# Altium PCB PCB_jaustry2.PcbDoc (part 2 of 2)
Units mm, origin at the board's own origin, x right, y up, seen from the top; angles counter-clockwise.
Board outline 112 x 80 mm, 8 copper layers (Top Side (Sig 1), Ground Plane 1 (GND), Signal Layer 2, Power Plane 1 (VCC), Power Plane 2 (VCC), Signal Layer 3, Ground Plane 2 (GND), Bottom Side (Sig 4)), stack 1.607 mm thick; 226 components, 308 nets, 1010 pads, 263 vias.
Unrouted connection lines stored in the file: 556.
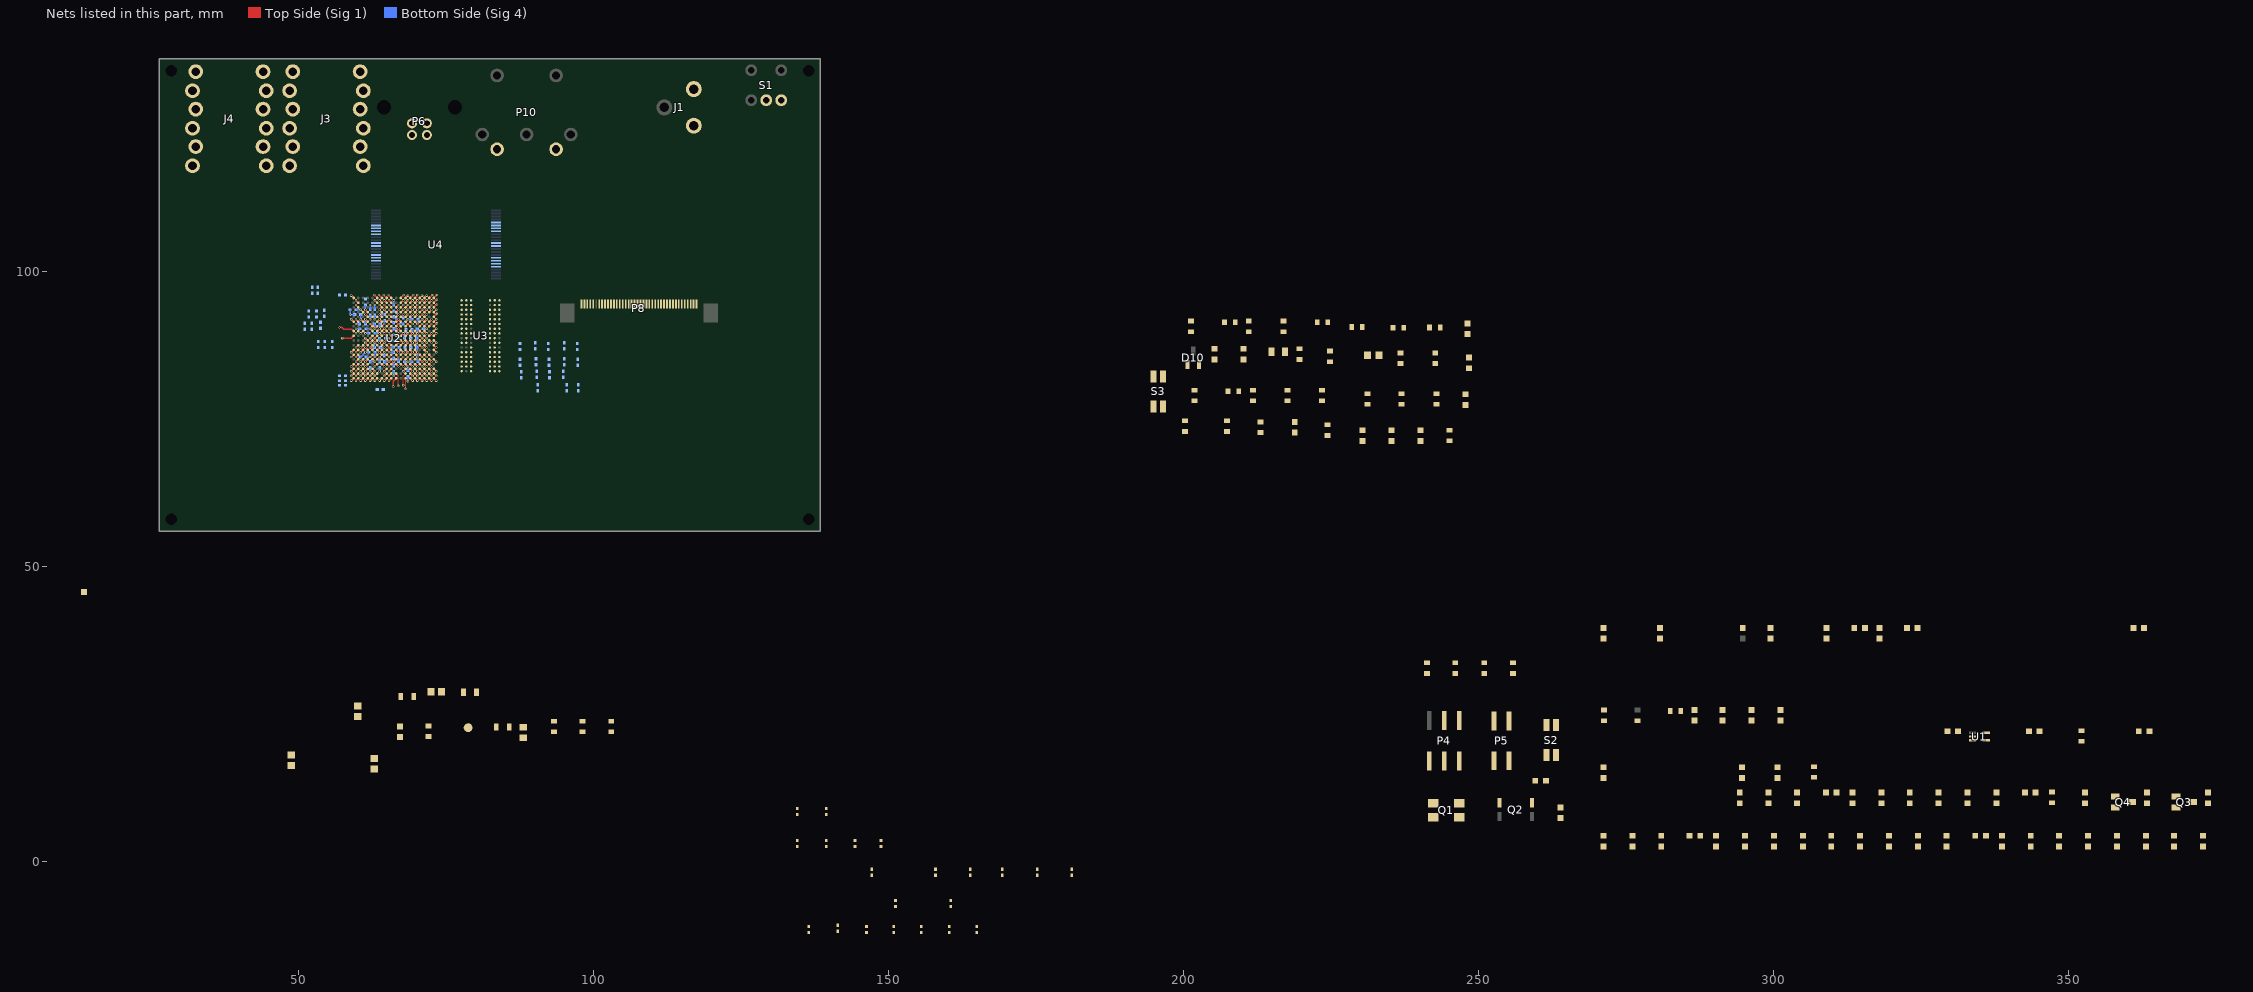
[diagram p6: the nets of this part, all layers, seen from the top]

## Via types
v1: diameter 0.4, hole 0.2, Top Side (Sig 1) to Bottom Side (Sig 4), 262 vias
v2: diameter 0.2, hole 0.1, Top Side (Sig 1) to Bottom Side (Sig 4), 1 vias

## Nets (pads, with @x,y where several pads share a name; then routed paths per layer and width w, separated by ;. In a path a pad name is that pad's centre, name@x,y a point inside that pad or via, vN(x,y) a via of type N, cw(c..) or ccw(c..) an arc to the next point about the centre after c; other vN are vias at no path point) (continued)
#WE: U2.B2 U3.L3 | length 0.6
  Top Side (Sig 1) w0.25: U2.B2@72.2,82.7 v1(72.6,82.3)
+1.1V_CORE: C51.2 C52.1 C53.1 C54.1 C55.1 C56.1 C57.1 C58.1 C59.1 C60.1 C61.1 C62.1 C63.1 C64.1 C167.1 L7.2 U2.F6 U2.F7 U2.G6 U2.G7 U2.G10 U2.H11 U2.J12 U2.K6 U2.K8 U2.K12 U2.L6 U2.L7 U2.L8 U2.L9 U2.M11 U2.M13 U2.N8 U2.N9 U2.N12 U2.N13 | length 19
  Top Side (Sig 1) w0.25: v1(63,90.3) U2.M13@63.4,90.7 ; U2.N13@63.4,91.5 v1(63.8,91.9) U2.N12@64.2,91.5 ; v1(63.8,87.9) U2.J12@64.2,88.3 ; v1(63.8,89.5) U2.K12@64.2,89.1 ; U2.H11@65,87.5 v1(65.4,87.1) U2.G10@65.8,86.7 ; U2.M11@65,90.7 v1(65.4,91.1) ; U2.L9@66.6,89.9 v1(67,90.3) U2.L8@67.4,89.9 ; U2.N9@66.6,91.5 v1(67,91.9) U2.N8@67.4,91.5 ; U2.K8@67.4,89.1 v1(67.8,89.5) U2.L7@68.2,89.9 ; U2.F7@68.2,85.9 v1(68.6,86.3) U2.G7@68.2,86.7 ; U2.F6@69,85.9 v1(69.4,86.3) U2.G6@69,86.7 ; U2.K6@69,89.1 v1(69.4,89.5) U2.L6@69,89.9
  Bottom Side (Sig 4) w0.25: C61.1@62.792,91.1 63,90.892 v1(63,90.3) ; C58.1@63.008,89.5 v1(63.8,89.5) ; C57.1@63.792,88.7 63.792,87.908 v1(63.8,87.9) ; v1(63.8,91.9) v1@63.808,91.892 ; v1(65.4,87.1) 66.108,87.1 C52.1@66.2,87.192 ; C60.1@66.2,90.308 66.208,90.3 v1(67,90.3) ; C59.1@66.2,92.308 66.608,91.9 v1(67,91.9) ; v1(67.8,89.5) 68.016,89.284 C56.1@68.016,88.7 ; C55.1@68.108,87.1 68.108,86.792 v1(68.6,86.3) ; C53.1@69.308,90.2 69.308,89.592 v1(69.4,89.5)
+1.1V_MPU: C73.1 C74.1 C75.1 C76.1 C77.1 C165.1 L6.2 U2.A2 U2.F10 U2.F11 U2.F12 U2.F13 U2.G13 U2.H13 U2.J13 | length 6.2
  Top Side (Sig 1) w0.25: v1(63,85.5) U2.F13@63.4,85.9 ; U2.G13@63.4,86.7 v1(63.8,86.3) U2.F12@64.2,85.9 ; U2.H13@63.4,87.5 v1(63,87.9) U2.J13@63.4,88.3 ; U2.F11@65,85.9 v1(65.4,85.5) U2.F10@65.8,85.9 ; U2.A2@72.2,81.9 v1(72.6,81.5)
  Bottom Side (Sig 4) w0.25: C77.1@62.892,87.1 62.892,87.792 v1(63,87.9) ; v1(63,85.5) 63.008,85.508 C75.1@63.008,86.3
+1.5V_DDR: C14.2 C20.1 C21.1 C23.1 C24.1 C25.1 C26.1 C27.1 C28.1 C29.1 C30.1 C31.1 C32.1 C33.1 C34.1 C35.1 C36.1 C37.1 C38.1 C109.1 C110.1 C111.1 C112.1 C113.1 C114.2 C163.1 L5.2 R4.2 R12.2 U2.E5 U2.F5 U2.G5 U2.H5 U2.J5 U2.K5 U2.L5 U3.A1 U3.A8 U3.B2 U3.C1 U3.C9 U3.D2 U3.D9 U3.E9 U3.F1 U3.G7 U3.H2 U3.H9 U3.K2 U3.K8 U3.N1 U3.N9 U3.R1 U3.R9 | length 9.5
  Top Side (Sig 1) w0.25: U2.E5@69.8,85.1 v1(70.2,85.5) ; U2.F5@69.8,85.9 v1(70.2,86.3) U2.G5@69.8,86.7 ; U2.H5@69.8,87.5 70.1,87.8 v1(70.1,87.9) 70.1,88 U2.J5@69.8,88.3 ; U2.K5@69.8,89.1 v1(70.2,89.5) U2.L5@69.8,89.9
  Bottom Side (Sig 4) w0.25: v1@70.1,89.4 v1(70.1,87.9) 70.108,87.892 C111.1@70.108,87.1 70.2,87.008 v1(70.2,86.3) ; C110.1@70.192,90.3 70.192,89.508 v1(70.2,89.5) ; v1(70.2,86.3) v1(70.2,85.5) 70.2,84.808 C29.1@70.308,84.7
+1.8V_PMIC: C88.1 C89.1 C90.1 C91.1 C92.1 C93.1 C94.1 C95.2 C96.2 C98.2 C108.2 C169.2 L1.2 L2.1 U2.E6 U2.E14 U2.F9 U2.K13 U2.N6 U2.N16 U2.P9 U2.P14 U2.R11 U2.R16 | length 10
  Top Side (Sig 1) w0.25: v1(60.6,91.9) U2.N16@61,91.5 ; v1(60.6,93.5) U2.R16@61,93.1 ; U2.E14@62.6,85.1 v1(63,84.7) ; v1(63,88.7) U2.K13@63.4,89.1 ; v1(64.6,93.5) U2.R11@65,93.1 ; U2.F9@66.6,85.9 v1(67,85.5) ; U2.P9@66.6,92.3 v1(67,92.7) ; U2.E6@69,85.1 v1(69.4,85.5) ; U2.N6@69,91.5 v1(69.4,91.1)
  Bottom Side (Sig 4) w0.25: C90.1@59.808,93.5 v1(60.6,93.5) ; v1(60.6,91.9) 60.608,91.908 C89.1@60.608,92.7 ; C88.1@62.2,84.708 62.992,84.708 v1(63,84.7) ; v1(62.2,91.9) C92.1@62.2,92.592 ; C108.2@66.2,93.292 66.408,93.292 v1(67,92.7) ; C94.1@66.992,84.7 66.992,85.492 v1(67,85.5)
+1.8V_VLDO1: C106.2 C174.1 R85.2 R86.2 U1.5 U2.D7 | length 1.3
  Top Side (Sig 1) w0.25: U2.D7@68.2,84.3 v1(68.6,83.9)
  Bottom Side (Sig 4) w0.25: C106.2@68.6,83.208 v1(68.6,83.9)
+3.3V_CORE: C40.2 C41.2 C49.1 C50.1 C65.1 C66.1 C67.1 C68.1 C69.1 C70.1 C71.1 C72.1 C78.1 C79.1 C80.1 C81.1 C82.1 C83.2 C87.2 C97.2 C116.2 P8.4 P8.31 Q3.2 R3.2 R7.1 R8.2 R9.1 R10.1 R19.2 R20.2 R21.2 R22.2 R23.2 R24.2 R25.2 R26.2 R27.2 R28.2 R29.2 R30.2 R31.2 R32.2 R33.2 R34.2 R35.2 R52.1 R82.1 R83.2 R84.2 U2.E10 U2.E11 U2.E12 U2.E13 U2.F14 U2.G14 U2.H14 U2.J14 U2.K14 U2.L14 U2.N5 U2.N15 U2.P5 U2.P6 U2.P7 U2.P8 U2.P10 U2.P11 U2.P12 U2.P13 U2.R15 U4.12 U4.37 | length 19.8
  Top Side (Sig 1) w0.25: v1(61.4,91.9) U2.N15@61.8,91.5 ; v1(61.4,93.5) U2.R15@61.8,93.1 ; v1(62.2,85.5) U2.F14@62.6,85.9 ; v1(62.2,87.9) U2.J14@62.6,88.3 ; v1(62.2,88.7) U2.K14@62.6,89.1 ; v1(62.2,90.3) U2.L14@62.6,89.9 ; U2.G14@62.6,86.7 v1(62.2,87.1) U2.H14@62.6,87.5 ; U2.E13@63.4,85.075 U2.E13@63.4,85.1 v1(63.8,85.5) 64.175,85.125 64.175,85.075 U2.E12@64.2,85.1 ; v1(63.8,92.7) U2.P12@64.2,92.3 ; U2.E11@65,85.1 v1(65.4,84.7) U2.E10@65.8,85.1 ; U2.P11@65,92.3 v1(65.4,92.7) U2.P10@65.8,92.3 ; U2.P8@67.4,92.3 v1(67.8,92.7) ; U2.P7@68.2,92.3 v1(68.6,92.7) ; U2.P6@69,92.3 v1(69.4,92.7) ; U2.N5@69.8,91.5 v1(70.2,91.1) ; U2.P5@69.8,92.3 v1(70.2,92.7)
  Bottom Side (Sig 4) w0.25: v1(61.4,91.9) 61.408,91.892 C78.1@61.408,91.1 ; v1(61.4,93.5) C80.1@61.4,94.292 ; C87.2@61.508,85.5 v1(62.2,85.5) ; C65.1@61.508,90.3 v1(62.2,90.3) ; v1(63,91.9) C79.1@63,92.592 ; C81.1@63.8,84.708 v1(63.8,85.5) ; v1(63.8,92.7) 63.808,92.708 C68.1@64.6,92.708 ; C50.1@64.6,84.692 65.392,84.692 v1(65.4,84.7) 65.984,85.284 C49.1@66.2,85.284 ; C82.1@67.8,92.208 v1(67.8,92.7) ; v1(70.2,91.1) 70.308,91.208 C66.1@70.308,91.9
+3.3V_VLDO2: C175.1 R89.1
+3.3VA: 
+5V: R81.1
+5VA: 
-5V: 
A0: U2.F3 U3.N3 | length 0.6
  Top Side (Sig 1) w0.25: U2.F3@71.4,85.9 v1(71.8,85.5)
A1: U2.H1 U3.P7 | length 0.6
  Top Side (Sig 1) w0.25: U2.H1@73,87.5 v1(73.4,87.1)
A2: U2.E4 U3.P3 | length 0.6
  Top Side (Sig 1) w0.25: U2.E4@70.6,85.1 v1(71,84.7)
A3: U2.C3 U3.N2 | length 0.6
  Top Side (Sig 1) w0.25: U2.C3@71.4,83.5 v1(71.8,83.1)
A4: U2.C2 U3.P8 | length 0.6
  Top Side (Sig 1) w0.25: U2.C2@72.2,83.5 v1(72.6,83.1)
A5: U2.B1 U3.P2 | length 0.6
  Top Side (Sig 1) w0.25: U2.B1@73,82.7 v1(73.4,82.3)
A6: U2.D5 U3.R8 | length 0.6
  Top Side (Sig 1) w0.25: U2.D5@69.8,84.3 v1(70.2,83.9)
A7: U2.E2 U3.R2 | length 0.6
  Top Side (Sig 1) w0.25: U2.E2@72.2,85.1 v1(72.6,84.7)
A8: U2.D4 U3.T8 | length 0.6
  Top Side (Sig 1) w0.25: U2.D4@70.6,84.3 v1(71,83.9)
A9: U2.C1 U3.R3 | length 0.6
  Top Side (Sig 1) w0.25: U2.C1@73,83.5 v1(73.4,83.1)
A10: U2.F4 U3.L7 | length 0.6
  Top Side (Sig 1) w0.15: U2.F4@70.542,85.9 U2.F4@70.6,85.9
  Top Side (Sig 1) w0.25: U2.F4@70.6,85.9 v1(71,85.5)
A11: U2.F2 U3.R7 | length 0.6
  Top Side (Sig 1) w0.25: U2.F2@72.2,85.9 v1(72.6,85.5)
A12: U2.E3 U3.N7 | length 0.6
  Top Side (Sig 1) w0.25: U2.E3@71.4,85.1 v1(71.8,84.7)
A13: U2.H3 U3.T3 | length 0.6
  Top Side (Sig 1) w0.25: U2.H3@71.4,87.5 v1(71.8,87.1)
A14: U2.H4 U3.T7 | length 0.6
  Top Side (Sig 1) w0.25: U2.H4@70.6,87.5 v1(71,87.1)
A15: U2.D3 U3.M7 | length 0.6
  Top Side (Sig 1) w0.25: U2.D3@71.4,84.3 v1(71.8,83.9)
ABITCLK: U2.A13 | length 0.6
  Top Side (Sig 1) w0.25: v1(63,81.5) U2.A13@63.4,81.9
AGND: G1.1 J3.1 J3.2 J3.3 J3.4 J3.7 J3.8 J3.9 J3.10 J4.1 J4.2 J4.3 J4.4 J4.7 J4.8 J4.9 J4.10 R119.2
"AUDIO IN LEFT": 
"AUDIO IN RIGHT": 
"AUDIO OUT LEFT": R2.2
"AUDIO OUT RIGHT": R1.2
AWORDCLK: U2.B13 | length 0.6
  Top Side (Sig 1) w0.25: v1(63,82.3) U2.B13@63.4,82.7
BA0: U2.C4 U3.M2 | length 0.6
  Top Side (Sig 1) w0.25: U2.C4@70.6,83.5 v1(71,83.1)
BA1: U2.E1 U3.N8 | length 0.6
  Top Side (Sig 1) w0.25: U2.E1@73,85.1 v1(73.4,84.7)
BA2: U2.B3 U3.M3 | length 0.6
  Top Side (Sig 1) w0.25: U2.B3@71.4,82.7 v1(71.8,82.3)
CK: U2.D2 U3.J7 | length 0.6
  Top Side (Sig 1) w0.25: U2.D2@72.2,84.3 v1(72.6,83.9)
CKE: R13.2 U2.G3 U3.K9 | length 0.6
  Top Side (Sig 1) w0.25: U2.G3@71.4,86.7 v1(71.8,86.3)
CODEC_SCLK: U2.A14 | length 0.6
  Top Side (Sig 1) w0.25: v1(62.2,81.5) U2.A14@62.6,81.9
DDR_VREF: C14.1 C16.2 C17.2 C42.1 R4.1 R5.2 U2.J4 U3.H1 U3.M8 | length 0.6
  Top Side (Sig 1) w0.25: U2.J4@70.6,88.3 v1(71,87.9)
"DIGITAL IN 1-2": U2.D13 | length 0.6
  Top Side (Sig 1) w0.25: v1(63,83.9) U2.D13@63.4,84.3
"DIGITAL OUT 1-2": U2.D12 | length 0.6
  Top Side (Sig 1) w0.25: U2.D12@64.2,84.3 v1(64.6,83.9)
DML: U2.M2 U3.E7 | length 0.6
  Top Side (Sig 1) w0.25: U2.M2@72.2,90.7 v1(72.6,91.1)
DMU: U2.J2 U3.D3 | length 0.6
  Top Side (Sig 1) w0.25: U2.J2@72.2,88.3 v1(72.6,87.9)
DQ0: U2.M3 U3.E3 | length 0.6
  Top Side (Sig 1) w0.25: U2.M3@71.4,90.7 v1(71.8,91.1)
DQ1: U2.M4 U3.F7 | length 0.6
  Top Side (Sig 1) w0.25: U2.M4@70.6,90.7 v1(71,91.1)
DQ2: U2.N1 U3.F2 | length 0.6
  Top Side (Sig 1) w0.25: U2.N1@73,91.5 v1(73.4,91.9)
DQ3: U2.N2 U3.F8 | length 0.6
  Top Side (Sig 1) w0.25: U2.N2@72.2,91.5 v1(72.6,91.9)
DQ4: U2.N3 U3.H3 | length 0.6
  Top Side (Sig 1) w0.25: U2.N3@71.4,91.5 v1(71.8,91.9)
DQ5: U2.N4 U3.H8 | length 0.6
  Top Side (Sig 1) w0.25: U2.N4@70.6,91.5 v1(71,91.9)
DQ6: U2.P3 U3.G2 | length 0.6
  Top Side (Sig 1) w0.25: U2.P3@71.4,92.3 v1(71.8,92.7)
DQ7: U2.P4 U3.H7 | length 0.6
  Top Side (Sig 1) w0.25: U2.P4@70.6,92.3 v1(71,92.7)
DQ8: U2.J1 U3.D7 | length 0.6
  Top Side (Sig 1) w0.25: U2.J1@73,88.3 v1(73.4,87.9)
DQ9: U2.K1 U3.C3 | length 0.6
  Top Side (Sig 1) w0.25: U2.K1@73,89.1 v1(73.4,89.5)
DQ10: U2.K2 U3.C8 | length 0.6
  Top Side (Sig 1) w0.25: U2.K2@72.2,89.1 v1(72.6,89.5)
DQ11: U2.K3 U3.C2 | length 0.6
  Top Side (Sig 1) w0.25: U2.K3@71.4,89.1 v1(71.8,88.7)
DQ12: U2.K4 U3.A7 | length 0.6
  Top Side (Sig 1) w0.25: U2.K4@70.6,89.1 v1(71,88.7)
DQ13: U2.L3 U3.A2 | length 0.6
  Top Side (Sig 1) w0.25: U2.L3@71.4,89.9 v1(71.8,89.5)
DQ14: U2.L4 U3.B8 | length 0.6
  Top Side (Sig 1) w0.25: U2.L4@70.6,89.9 v1(71,89.5)
DQ15: U2.M1 U3.A3 | length 0.7
  Top Side (Sig 1) w0.25: U2.M1@73,90.7 v1(73.5,91.2)
DQSL: U2.P1 U3.F3 | length 0.7
  Top Side (Sig 1) w0.25: U2.P1@73,92.3 v1(73.5,92.8)
DQSU: U2.L1 U3.C7 | length 0.6
  Top Side (Sig 1) w0.25: U2.L1@73,89.9 v1(73.4,90.3)
DSP_BYPASS: U2.C14 | length 0.6
  Top Side (Sig 1) w0.25: U2.C14@62.6,83.5 v1(63,83.1)
EXTINT: R85.1 U2.B18 | length 0.6
  Top Side (Sig 1) w0.25: v1(59,82.3) U2.B18@59.4,82.7
GND: C13.1 C15.1 C16.1 C17.1 C18.1 C19.1 C20.2 C21.2 C22.1 C23.2 C24.2 C25.2 C26.2 C27.2 C28.2 C29.2 C30.2 C31.2 C32.2 C33.2 C34.2 C35.2 C36.2 C37.2 C38.2 C39.2 C40.1 C41.1 C42.2 C43.1 C44.1 C45.1 C46.1 C49.2 C50.2 C51.1 C52.2 C53.2 C54.2 C55.2 C56.2 C57.2 C58.2 C59.2 C60.2 C61.2 C62.2 C63.2 C64.2 C65.2 C66.2 C67.2 C68.2 C69.2 C70.2 C71.2 C72.2 C73.2 C74.2 C75.2 C76.2 C77.2 C78.2 C79.2 C80.2 C81.2 C82.2 C83.1 C84.1 C85.1 C86.1 C87.1 C88.2 C89.2 C90.2 C91.2 C92.2 C93.2 C94.2 C95.1 C96.1 C97.1 C98.1 C99.2 C100.2 C101.2 C102.2 C103.2 C106.1 C107.2 C108.1 C109.2 C110.2 C111.2 C112.2 C113.2 C114.1 C116.1 C117.1 C158.1 C159.1 C160.1 C161.1 C162.1 C163.2 C164.1 C165.2 C166.1 C167.2 C168.1 C169.1 C170.1 C171.1 C172.1 C173.1 C174.2 C175.2 D11.1 G1.2 L3.1 P5.3 P5.4 P6.4 P8.3 P8.29 P8.36 Q1.2 Q1.4 R5.1 R11.2 R13.1 R14.1 R15.1 R16.1 R19.1 R36.1 R37.1 R38.1 R39.1 R40.1 R41.1 R42.1 R43.1 R44.1 R45.1 R46.1 R47.1 R48.1 R49.1 R50.1 R51.1 R87.1 R88.1 S2.1 S2.3 S3.1 S3.3 U1.3 U2.A1 U2.A5 U2.A18 U2.F8 U2.G8 U2.G9 U2.G11 U2.G12 U2.H6 U2.H7 U2.H8 U2.H9 U2.H10 U2.H12 U2.J6 U2.J7 U2.J8 U2.J9 U2.J10 U2.J11 U2.K7 U2.K9 U2.K10 U2.K11 U2.L10 U2.L11 U2.L12 U2.L13 U2.M6 U2.M7 U2.M8 U2.M9 U2.M10 U2.M12 U2.M14 U2.N7 U2.N10 U2.N11 U2.V1 U2.V11 U2.V18 U3.A9 U3.B1 U3.B3 U3.B9 U3.D1 U3.D8 U3.E1 U3.E2 U3.E8 U3.F9 U3.G1 U3.G8 U3.G9 U3.J2 U3.J8 U3.M1 U3.M9 U3.P1 U3.P9 U3.T1 U3.T9 U4.13 U4.36 | length 48.8
  Top Side (Sig 1) w0.25: v1(59,81.5) U2.A18@59.4,81.9 ; v1(59,95.9) U2.V18@59.4,95.5 ; v1(62.2,91.1) U2.M14@62.6,90.7 ; U2.L13@63.4,89.9 v1(63.8,90.3) ; U2.G12@64.2,86.7 v1(64.6,87.1) ; U2.H12@64.2,87.5 v1(64.6,87.9) U2.J11@65,88.3 ; U2.L12@64.2,89.9 v1(64.6,90.3) U2.L11@65,89.9 ; U2.M12@64.2,90.7 v1(64.6,91.1) ; v1(64.5,96) U2.V11@65,95.5 ; v1(64.6,89.5) U2.K11@65,89.1 ; U2.G11@65,86.7 v1(65.4,86.3) ; U2.N11@65,91.5 v1(65.4,91.9) U2.N10@65.8,91.5 U2.N10@65.775,91.475 ; v1(65.4,87.9) U2.H10@65.8,87.5 ; v1(65.4,88.7) U2.J10@65.8,88.3 ; v1(65.4,89.5) U2.K10@65.8,89.1 ; U2.L10@65.8,89.9 v1(65.4,90.3) U2.M10@65.8,90.7 ; U2.G9@66.6,86.7 v1(67,86.3) U2.G8@67.4,86.7 ; U2.H9@66.6,87.5 v1(67,87.9) U2.J9@66.6,88.3 ; U2.K9@66.6,89.1 v1(67,89.5) ; U2.M9@66.6,90.7 v1(67,91.1) U2.M8@67.4,90.7 ; U2.F8@67.4,85.9 v1(67.8,86.3) ; U2.H8@67.4,87.5 v1(67.8,87.9) U2.J8@67.4,88.3 ; U2.H7@68.2,87.5 v1(68.6,87.9) U2.J7@68.2,88.3 ; U2.K7@68.2,89.1 v1(68.6,89.5) ; U2.M7@68.2,90.7 v1(68.6,91.1) U2.M6@69,90.7 ; U2.N7@68.2,91.5 v1(68.6,91.9) ; U2.H6@69,87.5 v1(69.4,87.9) U2.J6@69,88.3 ; U2.A5@69.8,81.9 v1(70.2,81.5) ; U2.A1@73,81.9 v1(73.4,81.5) ; U2.V1@73,95.5 v1(73.5,96)
  Bottom Side (Sig 4) w0.25: C90.2@58.792,93.5 58.792,92.708 v1(58.8,92.7) C89.2@59.592,92.7 ; v1(59.8,90.3) C65.2@60.492,90.3 ; v1(59.8,91.1) C78.2@60.392,91.1 ; C87.1@60.492,85.5 60.6,85.5 v1(61.4,86.3) C75.2@61.992,86.3 ; v1(61.4,89.5) C58.2@61.992,89.5 ; v1@62.192,91.108 v1(62.2,91.1) ; v1(62.2,83.1) C88.2@62.2,83.692 ; C92.2@62.2,93.608 v1(62.2,94.3) ; C79.2@63,93.608 v1(63,94.3) ; v1(63.8,83.1) C81.2@63.8,83.692 ; v1(63.8,90.3) 63.8,91.092 C61.2@63.808,91.1 ; C77.2@63.908,87.1 v1(64.6,87.1) v1@64.582,87.118 ; C50.2@64.6,85.708 v1(64.6,86.3) ; v1(64.6,91.1) C68.2@64.6,91.692 ; C57.2@64.808,88.7 v1(65.4,88.7) ; v1(65.4,86.3) C49.2@66.2,86.3 ; v1(65.4,87.9) 65.708,88.208 C52.2@66.2,88.208 ; v1(65.4,89.5) 65.608,89.292 C60.2@66.2,89.292 ; v1(65.4,91.9) 66.008,91.292 C59.2@66.2,91.292 ; v1(66.2,82.3) C99.2@66.2,82.992 C99.2@66.308,83.1 ; C108.1@66.2,94.308 v1(66.2,95.1) ; C56.2@67,88.7 v1(67,89.5) ; v1(67,91.1) 67.792,91.1 C82.2@67.8,91.092 ; C55.2@67.092,87.192 C55.2@67.092,87.1 67.092,87.008 v1(67.8,86.3) ; C94.2@68.008,84.7 v1(68.6,84.7) C29.2@69.292,84.7 ; C53.2@68.292,90.2 68.292,89.808 v1(68.6,89.5) v1@68.608,89.508 ; v1(68.6,81.4) C106.1@68.6,82.192 ; v1(68.6,91.9) C66.2@69.292,91.9 ; C111.2@69.092,87.1 69.092,87.592 v1(69.4,87.9) 69.092,88.208 C109.2@69.092,88.7 ; C110.2@71.208,90.3 v1(71.8,90.3)
GNDA_ADC: C47.2 C48.2 C104.2 C105.1 L3.2 U2.A9 U2.E8 | length 2.2
  Top Side (Sig 1) w0.25: v1(66.1,80.5) 66.1,81.4 U2.A9@66.6,81.9 ; U2.E8@67.4,85.1 v1(67.8,85.5)
GPIO_INTERRUPT: U2.L18 | length 2.6
  Top Side (Sig 1) w0.25: v1(57,90.5) 57.4,90.5 57.7,90.2 59.1,90.2 U2.L18@59.4,89.9
I2C0_SCL: U2.C16 | length 0.6
  Top Side (Sig 1) w0.25: v1(60.6,83.1) U2.C16@61,83.5
I2C0_SDA: U2.C17 | length 0.6
  Top Side (Sig 1) w0.25: v1(59.8,83.1) U2.C17@60.2,83.5
I2C1_SCL: R83.1 U2.D15 | length 0.6
  Top Side (Sig 1) w0.25: v1(61.4,83.9) U2.D15@61.8,84.3
I2C1_SDA: R84.1 U2.D16 | length 0.6
  Top Side (Sig 1) w0.25: v1(60.6,83.9) U2.D16@61,84.3
I2C2_SCL: U2.D17 | length 0.6
  Top Side (Sig 1) w0.25: v1(59.8,83.9) U2.D17@60.2,84.3
I2C2_SDA: U2.D18 | length 0.6
  Top Side (Sig 1) w0.25: v1(59,83.9) U2.D18@59.4,84.3
LCD_B0: P8.21 U2.U10 | length 0.6
  Top Side (Sig 1) w0.25: v1(65.4,95.1) U2.U10@65.8,94.7
LCD_B1: P8.22 U2.U12 | length 0.6
  Top Side (Sig 1) w0.25: v1(63.8,95.1) U2.U12@64.2,94.7
LCD_B2: P8.23 U2.V13 | length 0.7
  Top Side (Sig 1) w0.25: v1(62.9,96) U2.V13@63.4,95.5
LCD_B3: P8.24 R31.1 R47.2 U2.U4 | length 0.6
  Top Side (Sig 1) w0.25: U2.U4@70.6,94.7 v1(71,95.1)
LCD_B4: P8.25 R32.1 R48.2 U2.V2 | length 0.7
  Top Side (Sig 1) w0.25: U2.V2@72.2,95.5 v1(72.7,96)
LCD_B5: P8.26 R33.1 R49.2 U2.V3 | length 0.6
  Top Side (Sig 1) w0.25: U2.V3@71.4,95.5 v1(71.8,95.9)
LCD_B6: P8.27 R34.1 R50.2 U2.V4 | length 0.6
  Top Side (Sig 1) w0.25: U2.V4@70.6,95.5 v1(71,95.9)
LCD_B7: P8.28 R35.1 R51.2 U2.T5 | length 0.6
  Top Side (Sig 1) w0.25: U2.T5@69.8,93.9 v1(70.2,94.3)
LCD_BKL: Q3.3 R16.2 U2.C18 | length 0.6
  Top Side (Sig 1) w0.25: v1(59,83.1) U2.C18@59.4,83.5
LCD_CLK: P8.30 U2.V5 | length 0.7
  Top Side (Sig 1) w0.25: U2.V5@69.8,95.5 70.2,95.9 v1(70.2,96)
LCD_DE: P8.34 U2.R6 | length 0.6
  Top Side (Sig 1) w0.25: U2.R6@69,93.1 v1(69.4,93.5)
LCD_G0: P8.13 U2.T10 | length 0.6
  Top Side (Sig 1) w0.25: v1(65.4,94.3) U2.T10@65.8,93.9
LCD_G1: P8.14 U2.T12 | length 0.6
  Top Side (Sig 1) w0.25: v1(63.8,94.3) U2.T12@64.2,93.9
LCD_G2: P8.15 R25.1 R41.2 U2.T2 | length 0.6
  Top Side (Sig 1) w0.25: U2.T2@72.2,93.9 v1(72.6,94.3)
LCD_G3: P8.16 R26.1 R42.2 U2.T3 | length 0.6
  Top Side (Sig 1) w0.25: U2.T3@71.4,93.9 v1(71.8,94.3)
LCD_G4: P8.17 R27.1 R43.2 U2.T4 | length 0.6
  Top Side (Sig 1) w0.25: U2.T4@70.6,93.9 v1(71,94.3)
LCD_G5: P8.18 R28.1 R44.2 U2.U1 | length 0.7
  Top Side (Sig 1) w0.25: U2.U1@73,94.7 v1(73.5,95.2)
LCD_G6: P8.19 R29.1 R45.2 U2.U2 | length 0.6
  Top Side (Sig 1) w0.25: U2.U2@72.2,94.7 v1(72.6,95.1)
LCD_G7: P8.20 R30.1 R46.2 U2.U3 | length 0.6
  Top Side (Sig 1) w0.25: U2.U3@71.4,94.7 v1(71.8,95.1)
LCD_HSYNC: P8.32 U2.R5 | length 0.6
  Top Side (Sig 1) w0.25: U2.R5@69.8,93.1 v1(70.2,93.5)
LCD_R0: P8.5 U2.T11 | length 0.6
  Top Side (Sig 1) w0.25: v1(64.6,94.3) U2.T11@65,93.9
LCD_R1: P8.6 U2.R12 | length 0.6
  Top Side (Sig 1) w0.25: v1(63.8,93.5) U2.R12@64.2,93.1
LCD_R2: P8.7 U2.U13 | length 0.6
  Top Side (Sig 1) w0.25: v1(63,95.1) U2.U13@63.4,94.7
LCD_R3: P8.8 R20.1 R36.2 U2.R1 | length 0.6
  Top Side (Sig 1) w0.25: U2.R1@73,93.1 v1(73.4,93.5)
LCD_R4: P8.9 R21.1 R37.2 U2.R2 | length 0.6
  Top Side (Sig 1) w0.25: U2.R2@72.2,93.1 v1(72.6,93.5)
LCD_R5: P8.10 R22.1 R38.2 U2.R3 | length 0.6
  Top Side (Sig 1) w0.25: U2.R3@71.4,93.1 v1(71.8,93.5)
LCD_R6: P8.11 R23.1 R39.2 U2.R4 | length 0.6
  Top Side (Sig 1) w0.25: U2.R4@70.6,93.1 v1(71,93.5)
LCD_R7: P8.12 R24.1 R40.2 U2.T1 | length 0.7
  Top Side (Sig 1) w0.25: U2.T1@73,93.9 v1(73.5,94.4)
LCD_VSYNC: P8.33 U2.U5 | length 0.6
  Top Side (Sig 1) w0.25: U2.U5@69.8,94.7 v1(70.2,95.1)
LCD_X1: C43.2 P8.37 U2.B6 | length 0.6
  Top Side (Sig 1) w0.25: U2.B6@69,82.7 v1(69.4,82.3)
LCD_X2: C44.2 P8.39 U2.C7 | length 0.6
  Top Side (Sig 1) w0.25: v1(67.8,83.1) U2.C7@68.2,83.5
LCD_Y1: C45.2 P8.38 U2.B7 | length 2.2
  Top Side (Sig 1) w0.15: v1(67.8,80.7) 67.8,82.3 U2.B7@68.2,82.7
LCD_Y2: C46.2 P8.40 U2.A7 | length 1.8
  Top Side (Sig 1) w0.15: v1(68.2,80.1) U2.A7@68.2,81.9
LDO_PGOOD: U2.B5 | length 0.6
  Top Side (Sig 1) w0.25: U2.B5@69.8,82.7 v1(70.2,82.3)
MIDI: 
NALE: U2.R7 U4.17 | length 0.6
  Top Side (Sig 1) w0.25: U2.R7@68.2,93.1 v1(68.6,93.5)
NCE0: U2.U6 U2.V6 U4.18 | length 1.3
  Top Side (Sig 1) w0.25: U2.U6@69,94.7 v1(69.4,95.1) ; U2.V6@69,95.5 v1(69.5,96)
NCLE: U2.T6 U4.16 | length 0.6
  Top Side (Sig 1) w0.25: U2.T6@69,93.9 v1(69.4,94.3)
NDQ0: U2.U7 U4.29 | length 0.6
  Top Side (Sig 1) w0.25: U2.U7@68.2,94.7 v1(68.6,95.1)
NDQ1: U2.V7 U4.30 | length 0.6
  Top Side (Sig 1) w0.25: U2.V7@68.2,95.5 v1(68.6,95.9)
NDQ2: U2.R8 U4.31 | length 0.6
  Top Side (Sig 1) w0.25: U2.R8@67.4,93.1 v1(67.8,93.5)
NDQ3: U2.T8 U4.32 | length 0.6
  Top Side (Sig 1) w0.25: U2.T8@67.4,93.9 v1(67.8,94.3)
NDQ4: U2.U8 U4.41 | length 0.6
  Top Side (Sig 1) w0.25: U2.U8@67.4,94.7 v1(67.8,95.1)
NDQ5: U2.V8 U4.42 | length 0.7
  Top Side (Sig 1) w0.25: U2.V8@67.4,95.5 v1(67.9,96)
NDQ6: U2.R9 U4.43 | length 0.6
  Top Side (Sig 1) w0.25: U2.R9@66.6,93.1 v1(67,93.5)
NDQ7: U2.T9 U4.44 | length 0.6
  Top Side (Sig 1) w0.25: U2.T9@66.6,93.9 v1(67,94.3)
NetC1_2: 
NetC8_1: S1.3
NetC8_2: 
NetC9_1: J1.1
NetC9_2: 
NetC10_2: 
NetC13_2: C13.2 R3.1 S2.2 S2.4 U1.4 U2.A10 | length 0.6
  Top Side (Sig 1) w0.25: v1(65.4,81.5) U2.A10@65.8,81.9
NetC15_2: C15.2 Q1.3 U2.V10 | length 0.7
  Top Side (Sig 1) w0.25: v1(65.3,96) U2.V10@65.8,95.5
NetC18_2: C18.2 Q1.1 U2.U11 | length 0.6
  Top Side (Sig 1) w0.25: v1(64.6,95.1) U2.U11@65,94.7
NetC19_2: C19.2 Q2.2 U2.A6 | length 0.6
  Top Side (Sig 1) w0.25: U2.A6@69,81.9 v1(69.4,81.5)
NetC22_2: C22.2 Q2.1 U2.A4 | length 0.6
  Top Side (Sig 1) w0.25: U2.A4@70.6,81.9 v1(71,81.5)
NetC39_1: C39.1 R10.2 U4.19
NetC84_2: C84.2 U2.D9 | length 0.6
  Top Side (Sig 1) w0.25: U2.D9@66.6,84.3 v1(67,83.9)
NetC85_2: C85.2 U2.D11 | length 0.6
  Top Side (Sig 1) w0.25: U2.D11@65,84.3 v1(65.4,83.9)
NetC86_2: C86.2 U2.C10 | length 0.6
  Top Side (Sig 1) w0.25: v1(65.4,83.1) U2.C10@65.8,83.5
NetC99_1: C99.1 C100.1 C101.1 C102.1 C103.1 L1.1 U2.D10 U2.E7 U2.E9 U2.H15 U2.R10 | length 3.5
  Top Side (Sig 1) w0.25: v1(61.4,87.9) U2.H15@61.8,87.5 ; v1(65.4,93.5) U2.R10@65.8,93.1 ; U2.D10@65.8,84.3 v1(66.2,84.7) U2.E9@66.6,85.1 ; U2.E7@68.2,85.1 v1(68.6,85.5)
  Bottom Side (Sig 4) w0.25: C99.1@66.2,84.008 v1(66.2,84.7)
NetC107_1: C107.1 U2.D6 | length 0.6
  Top Side (Sig 1) w0.25: U2.D6@69,84.3 v1(69.4,83.9)
NetC117_2: C117.2 C118.1 L4.2
NetC119_2: 
NetC120_2: 
NetC121_2: 
NetC122_2: 
NetC132_1: 
NetC133_1: 
NetC134_1: 
NetC139_E_1: 
NetC139_E_2: 
NetC139_V_1: 
NetC139_V_2: 
NetC140_E_1: 
NetC140_V_1: 
NetC141_E_1: 
NetC141_E_2: 
NetC141_V_1: 
NetC141_V_2: 
NetC142_E_1: 
NetC142_E_2: 
NetC142_V_1: 
NetC142_V_2: 
NetC143_E_1: 
NetC146_1: 
NetC146_2: 
NetC147_1: C147.1
NetC147_2: C147.2
NetC148_1: 
NetC148_2: 
NetC149_1: C149.1
NetC149_2: C149.2
NetC150_2: 
NetC151_1: 
NetC151_2: 
NetC152_1: C152.1
NetC152_2: C152.2
NetC153_1: 
NetC153_2: 
NetC154_1: C154.1
NetC154_2: C154.2
NetC155_2: 
NetC158_2: C158.2 R81.2
NetC159_2: C159.2
NetC160_2: C160.2
NetC171_2: C171.2 R82.2
NetC172_2: C172.2 D10.2 Q4.3 R17.1
NetC176_1: 
NetC176_2: 
NetC177_1: 
NetC177_2: 
NetC178_1: 
NetC178_2: J3.12
NetC181_2: 
NetC183_2: J3.11
NetC184_1: 
NetC184_2: 
NetC190_1: 
NetC190_2: 
NetC191_1: 
NetC191_2: 
NetC192_1: 
NetC192_2: J3.6
NetC195_2: 
NetC197_2: J3.5
NetC198_1: 
NetC198_2: 
NetC199_1: C199.1 R118.2 R119.1
NetC199_2: C199.2 R117.2
NetC200_1: 
NetC200_2: 
NetC202_1: 
NetC203_1: 
NetC203_2: 
NetC204_1: 
NetC204_2: 
NetC206_1: 
NetD9_1: 
NetD9_2: P10.5
NetD10_1: D10.1 L8.2
NetD11_2: D11.2 R89.2
NetJ1_3: J1.3 S1.2
NetJ2_1: J2.1 U2.A3 | length 0.6
  Top Side (Sig 1) w0.25: U2.A3@71.4,81.9 v1(71.8,81.5)
NetJ4_5: J4.5
NetJ4_6: J4.6
NetJ4_11: J4.11 R118.1
NetJ4_12: J4.12
NetL4_1: L4.1 R53.1 R54.1 R55.1
NetL5_1: L5.1
NetL6_1: L6.1
NetL7_1: L7.1
NetP4_1: P4.1 U2.A12 | length 0.6
  Top Side (Sig 1) w0.25: v1(63.8,81.5) U2.A12@64.2,81.9
NetP4_2: P4.2 U2.C11 | length 0.6
  Top Side (Sig 1) w0.25: v1(64.6,83.1) U2.C11@65,83.5
NetP4_3: P4.3 U2.A11 | length 0.6
  Top Side (Sig 1) w0.25: v1(64.6,81.5) U2.A11@65,81.9
NetP4_4: P4.4 U2.B11 | length 0.6
  Top Side (Sig 1) w0.25: v1(64.6,82.3) U2.B11@65,82.7
NetP4_5: P4.5 U2.B10 | length 0.6
  Top Side (Sig 1) w0.25: v1(65.4,82.3) U2.B10@65.8,82.7
NetP5_1: P5.1 U2.E16 | length 0.6
  Top Side (Sig 1) w0.25: v1(60.6,84.7) U2.E16@61,85.1
NetP5_2: P5.2 U2.E15 | length 0.6
  Top Side (Sig 1) w0.25: v1(61.4,84.7) U2.E15@61.8,85.1
NetP8_1: P8.1
NetP8_2: P8.2 R17.2 R18.2
NetP10_4: P10.4
NetQ3_1: Q3.1 Q4.2
NetQ4_1: Q4.1 R18.1
NetR1_1: R1.1
NetR2_1: R2.1
NetR6_1: R6.1 U2.V12 | length 0.7
  Top Side (Sig 1) w0.25: v1(63.7,96) U2.V12@64.2,95.5
NetR9_2: R9.2 U4.9
NetR11_1: R11.1 U3.L8
NetR14_2: R14.2 U2.J3 | length 0.6
  Top Side (Sig 1) w0.25: U2.J3@71.4,88.3 v1(71.8,87.9)
NetR15_2: R15.2 U2.B4 | length 0.6
  Top Side (Sig 1) w0.25: U2.B4@70.6,82.7 v1(71,82.3)
NetR56_2: 
NetR57_2: 
NetR80_2: 
NetR87_2: R87.2
NetR88_2: R88.2
NetR97_1: 
NetR98_1: 
NetR102_1: 
NetR103_1: 
NetR104_1: 
NetR112_1: 
NetR113_1: 
NetR117_1: R117.1
NetR120_2: 
NetR124_2: 
NetR126_2: 
NetR127_1: 
NetR128_1: 
NetR129_1: 
NetR132_2: 
NetR136_2: 
NetS3_2: S3.2 S3.4
NetU2_K18: U2.K18 | length 2.1
  Top Side (Sig 1) w0.25: v1(57.5,88.7) 59,88.7 U2.K18@59.4,89.1
NRB0: R8.1 U2.T17 | length 0.6
  Top Side (Sig 1) w0.25: v1(59.8,94.3) U2.T17@60.2,93.9
NRB1: R6.2 R7.2 U4.7
NRE: U2.T7 U2.U17 U4.8 | length 1.1
  Top Side (Sig 1) w0.25: v1(59.8,95.1) U2.U17@60.2,94.7 ; U2.T7@68.2,93.9 v1(68.6,94.3)
ODT: U2.G1 U3.K1 | length 0.6
  Top Side (Sig 1) w0.25: U2.G1@73,86.7 v1(73.4,86.3)
PGOOD: U1.2 U2.B15 | length 0.6
  Top Side (Sig 1) w0.25: v1(61.4,82.3) U2.B15@61.8,82.7
PWR_EN: U2.C6 | length 0.6
  Top Side (Sig 1) w0.25: U2.C6@69,83.5 v1(69.4,83.1)
RST_ATMega: U2.B14 | length 0.6
  Top Side (Sig 1) w0.25: v1(62.2,82.3) U2.B14@62.6,82.7
SD_CLK: U2.G17 | length 0.6
  Top Side (Sig 1) w0.25: v1(59.8,86.3) U2.G17@60.2,86.7
SD_CMD: R52.2 U2.G18 | length 0.6
  Top Side (Sig 1) w0.25: v1(59,86.3) U2.G18@59.4,86.7
SD_DAT0: R53.2 U2.G16 | length 0.6
  Top Side (Sig 1) w0.25: v1(60.6,86.3) U2.G16@61,86.7
SD_DAT1: R54.2 U2.G15 | length 0.6
  Top Side (Sig 1) w0.25: v1(61.4,87.1) U2.G15@61.8,86.7
SD_DAT2: R55.2 U2.F18 | length 0.6
  Top Side (Sig 1) w0.25: v1(59,85.5) U2.F18@59.4,85.9
SD_DAT3: U2.F17 | length 0.6
  Top Side (Sig 1) w0.25: v1(59.8,85.5) U2.F17@60.2,85.9
SPI0_CS0: U2.A16 | length 0.6
  Top Side (Sig 1) w0.25: v1(60.6,81.5) U2.A16@61,81.9
SPI0_CS1: U2.C15 | length 0.6
  Top Side (Sig 1) w0.25: v1(61.4,83.1) U2.C15@61.8,83.5
SPI0_MISO: U2.B17 | length 0.6
  Top Side (Sig 1) w0.25: v1(59.8,82.3) U2.B17@60.2,82.7
SPI0_MOSI: U2.B16 | length 0.6
  Top Side (Sig 1) w0.25: v1(60.6,82.3) U2.B16@61,82.7
SPI0_SCLK: U2.A17 | length 0.6
  Top Side (Sig 1) w0.25: v1(59.8,81.5) U2.A17@60.2,81.9
SPI1_CS0_CODEC: U2.E17 | length 0.6
  Top Side (Sig 1) w0.25: v1(59.8,84.7) U2.E17@60.2,85.1
SPI1_CS1_ATMega: U2.A15 | length 0.6
  Top Side (Sig 1) w0.25: v1(61.4,81.5) U2.A15@61.8,81.9
SPI1_MISO: U2.H17 | length 0.6
  Top Side (Sig 1) w0.25: v1(59.8,87.1) U2.H17@60.2,87.5
SPI1_MOSI: U2.J15 | length 0.6
  Top Side (Sig 1) w0.25: v1(61.4,88.7) U2.J15@61.8,88.3
SPI1_SCLK: U2.H16 | length 0.6
  Top Side (Sig 1) w0.25: v1(60.6,87.1) U2.H16@61,87.5
SYS: C161.2 C162.2 C164.2 C166.2 C168.2 C170.2 C173.2 L8.1
UART_ATM-to-Proc: U2.L17
  other v1: 59.8,89.5
UART_Proc-to-ATM: U2.L16 | length 0.6
  Top Side (Sig 1) w0.15: v1(60.6,89.5) U2.L16@61,89.9
USB0_DM: P6.2 U2.N18 | length 0.6
  Top Side (Sig 1) w0.25: v1(59,91.9) U2.N18@59.4,91.5
USB0_DP: P6.3 U2.N17 | length 0.6
  Top Side (Sig 1) w0.25: v1(59.8,91.9) U2.N17@60.2,91.5
USB0_VBUS: P6.1 U2.P15 | length 0.6
  Top Side (Sig 1) w0.25: v1(61.4,92.7) U2.P15@61.8,92.3
VDDA_ADC: C47.1 C48.1 C104.1 C105.2 L2.2 U2.B9 U2.D8 | length 2.8
  Top Side (Sig 1) w0.1: U2.B9@66.6,82.7 67,82.3 v1(67,80.6)
  Top Side (Sig 1) w0.25: U2.D8@67.4,84.3 v1(67.8,83.9)
WAKEUP: R86.1 U2.C5 | length 0.6
  Top Side (Sig 1) w0.25: U2.C5@69.8,83.5 v1(70.2,83.1)
pads on no net: C118.2 D10.3 J1.2 P4.6 P6. P8. P8.35 P10. P10.1 P10.2 P10.3 Q2.3 Q2.4 S1. S1.1 U1.1 U2.A8 U2.B8 U2.B12 U2.C8 U2.C9 U2.C12 U2.C13 U2.D14 U2.E18 U2.F15 U2.F16 U2.H18 U2.J16 U2.J17 U2.J18 U2.K15 U2.K16 U2.K17 U2.L15 U2.M5 U2.M15 U2.M16 U2.M17 U2.M18 U2.N14 U2.P16 U2.P17 U2.P18 U2.R13 U2.R14 U2.R17 U2.R18 U2.T13 U2.T14 U2.T15 U2.T16 U2.T18 U2.U9 U2.U14 U2.U15 U2.U16 U2.U18 U2.V9 U2.V14 U2.V15 U2.V16 U2.V17 U3.J1 U3.J9 U3.L1 U3.L9 U4.1 U4.2 U4.3 U4.4 U4.5 U4.6 U4.10 U4.11 U4.14 U4.15 U4.20 U4.21 U4.22 U4.23 U4.24 U4.25 U4.26 U4.27 U4.28 U4.33 U4.34 U4.35 U4.38 U4.39 U4.40 U4.45 U4.46 U4.47 U4.48
copper on no net:
  other v2: 66.2,88.7

## Polygon pours and split planes (outlines as drawn)
GND on Ground Plane 1 (GND) (split plane): 137.99,56.51 27.01,56.51 27.01,135.49 137.99,135.49
no net on Power Plane 1 (VCC) (split plane): 137.99,56.51 27.01,56.51 27.01,135.49 137.99,135.49
no net on Power Plane 2 (VCC) (split plane): 137.99,56.51 27.01,56.51 27.01,135.49 137.99,135.49
GND on Ground Plane 2 (GND) (split plane): 137.99,56.51 27.01,56.51 27.01,135.49 137.99,135.49

## Keep-outs
Keep-Out Layer:
  lines w0.1: 27.2,56.7 27.2,135.3 137.8,135.3 137.8,56.7 27.2,56.7

## Silkscreen, mask and mechanical layers (free items; w line width, h text height)
Mechanical 1:
  lines w0.15: 35,76 35,130 130,130 ; 35,76.009 130,76.009 130,130.009 ; 26.5,56 26.5,136 138.5,136 138.5,56 26.5,56
  text "PMIC" at 181.6,82.8 h8
  text "De'couplage / PP3 Proc" at 39.7,-18.5 h8